# EAGLE board ELE-T201 (EAGLE 4.11)
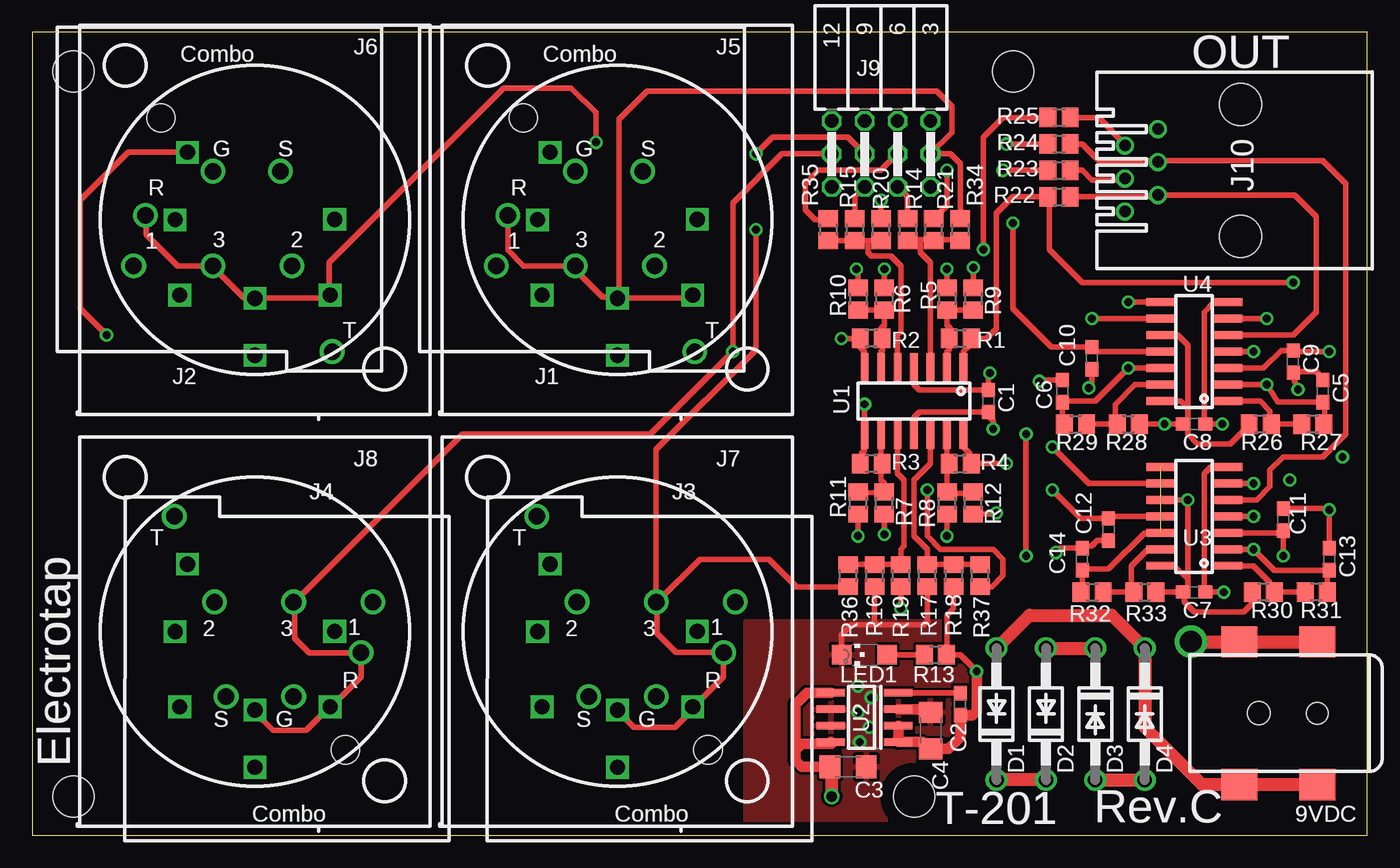
[diagram p0: board, top side]
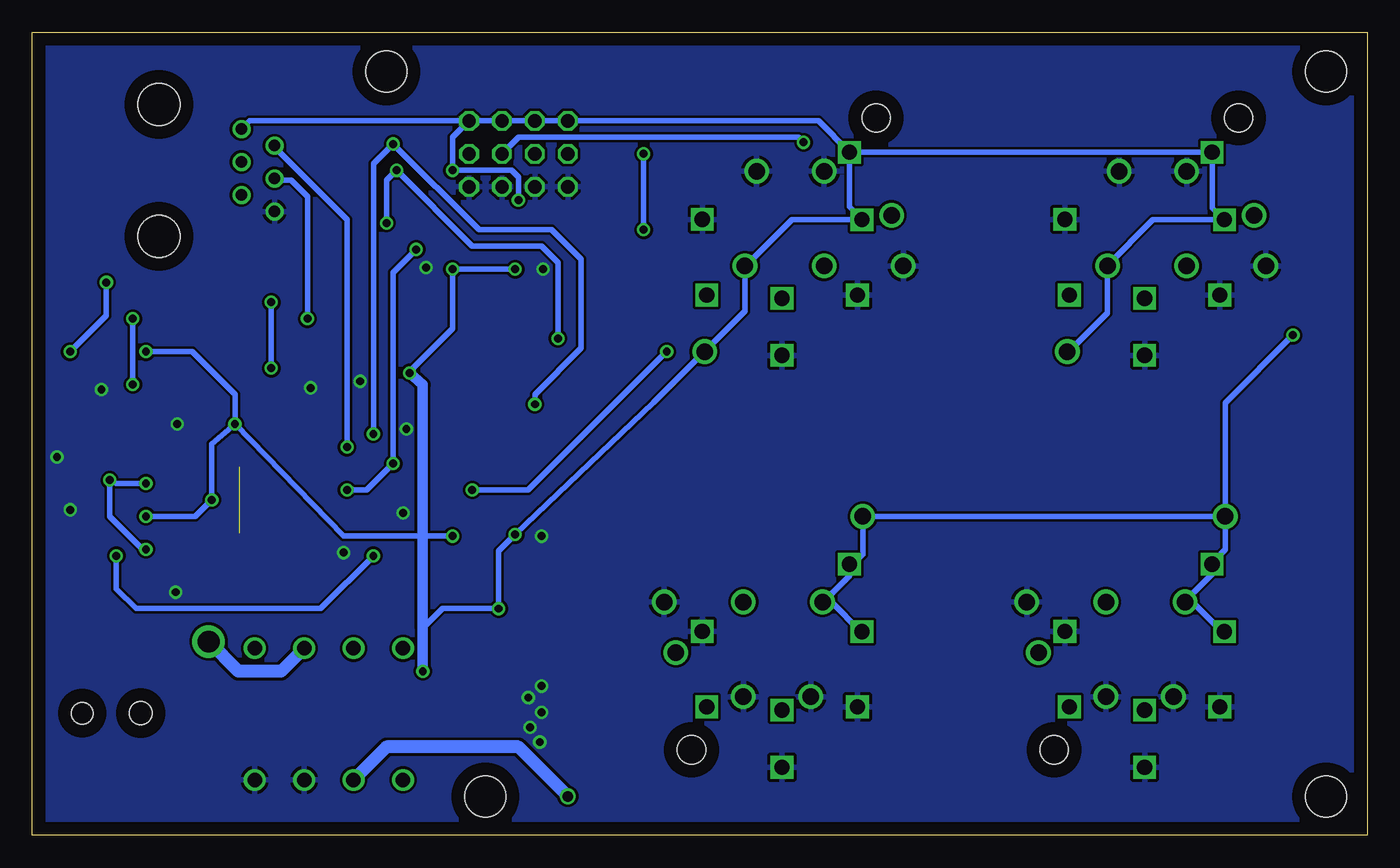
[diagram p1: board, bottom side, seen from below]

Size 102.85 x 61.9 mm. Coordinates in mm from the lower left corner, seen from the top.
Outline: 0,0 102.85,0 102.85,61.9 0,61.9 0,0
Copper layers (1*16): Top 0.035mm / dielectric 1.5mm / Bottom 0.035mm
Design rules "default": minimum track width 10mil, minimum drill 24mil, track to track 8mil, track to pad 8mil, pad to pad 8mil, via to via 8mil, smd to smd 8mil, copper to edge 40mil, drill to drill 8mil, minimum pad ring 10mil, minimum via ring 8mil, stop-mask expansion 4mil, vias tented up to drill 0mil, thermal gap 10mil
Holes 3.17 mm at 75.56,58.89 67.94,3.01 3.17,3.01 3.17,58.89

## Footprints (pad centres in the part's own frame; a part is rotated, then mirrored left to right if it is on the bottom)
POWER_CONNECTOR = smd 2.4 x 2.8: +1 10,-5; +2 10,-11; -1 -1,-5; -2 -1,-11 | hole 1.778: 4.5,-9.5 | hole 1.676: 4.5,-5
C0603 = smd 1.1 x 1: 1 -0.85,0; 2 0.85,0
C1206 = smd 1.6 x 1.8: 1 -1.4,0; 2 1.4,0
DO41-10 = drill 1.118 round: A 5.08,0; C -5.08,0
NEUTRIK_COMBO_CONNECTOR_H = drill 1.27 round: 1 5.9,6.6; 2 18.1,6.6; 3 12,6.6; G 12,13.9; R 6.8,10.5; S 17.2,13.9; T 21.2,0 | hole 2.184: 8,18
NEUTRIK_COMBO_CONNECTOR = drill 1.168 square: 1 6.15,0.025; 2 -6.15,0; 3 0,-6.05; G 0,-10.45; R 5.8,-5.8; S -5.8,-5.8; T -5.2,5.2
HEADER-FE-3X4-RA = drill 1.016 octagon: 1 -5.08,3.81; 2 -5.08,1.27; 3 -5.08,-1.27; 4 -2.54,3.81; 5 -2.54,1.27; 6 -2.54,-1.27; 7 0,3.81; 8 0,1.27; 9 0,-1.27; 10 2.54,3.81; 11 2.54,1.27; 12 2.54,-1.27
TELEPHONE_JACK = drill 0.889 round: 1 -3.175,8.89; 2 -1.905,6.35; 3 -0.635,8.89; 4 0.635,6.35; 5 1.905,8.89; 6 3.175,6.35 | hole 3.251: -5.08,0; 5.08,0
CHIPLED_1206 = smd 1.5 x 1.5: A 0,-1.75; C 0,1.75
R0805 = smd 1.3 x 1.5: 1 -0.85,0; 2 0.85,0
SO14 = smd 0.6 x 2.2: 1 -3.81,-2.6; 2 -2.54,-2.6; 3 -1.27,-2.6; 4 0,-2.6; 5 1.27,-2.6; 6 2.54,-2.6; 7 3.81,-2.6; 8 3.81,2.6; 9 2.54,2.6; 10 1.27,2.6; 11 0,2.6; 12 -1.27,2.6; 13 -2.54,2.6; 14 -3.81,2.6
SOIC8 = smd 0.6 x 2.2: 1 -1.905,-2.6; 2 -0.635,-2.6; 3 0.635,-2.6; 4 1.905,-2.6; 5 1.905,2.6; 6 0.635,2.6; 7 -0.635,2.6; 8 -1.905,2.6

## Placement (x,y rotation side)
9VDC  POWER_CONNECTOR  [POWER_CONNECTOR]  104.01,13.93 270 top
C1  0.1uF  [C0603]  73.66,33.49 270 top
C2  .01uF  [C0603]  71.5,10.12 90 top
C3  10uF  [C1206]  62.86,5.3 0 top
C4  10uF  [C1206]  69.21,8.09 90 top
C5  0.01uF  [C0603]  99.44,34.25 90 top
C6  0.01uF  [C0603]  79.37,34.25 90 top
C7  0.1uF  [C0603]  89.53,18.76 180 top
C8  0.1uF  [C0603]  89.53,31.71 180 top
C9  0.1uF  [C0603]  97.15,36.54 90 top
C10  0.1uF  [C0603]  81.66,36.79 90 top
C11  0.1uF  [C0603]  96.39,24.35 90 top
C12  0.1uF  [C0603]  82.93,23.58 270 top
C13  0.01uF  [C0603]  99.94,21.3 90 top
C14  0.01uF  [C0603]  80.89,21.3 90 top
D1  1N4001  [DO41-10]  74.29,9.36 90 top
D2  1N4001  [DO41-10]  78.1,9.36 90 top
D3  1N4001  [DO41-10]  81.91,9.36 270 top
D4  1N4001  [DO41-10]  85.72,9.36 270 top
J1  [NEUTRIK_COMBO_CONNECTOR_H]  29.84,37.3 0 top
J2  [NEUTRIK_COMBO_CONNECTOR_H]  1.9,37.3 0 top
J3  [NEUTRIK_COMBO_CONNECTOR_H]  60.07,24.6 180 top
J4  [NEUTRIK_COMBO_CONNECTOR_H]  32.13,24.6 180 top
J5  [NEUTRIK_COMBO_CONNECTOR]  45.08,47.46 0 top
J6  [NEUTRIK_COMBO_CONNECTOR]  17.14,47.46 0 top
J7  [NEUTRIK_COMBO_CONNECTOR]  45.08,15.71 0 top
J8  [NEUTRIK_COMBO_CONNECTOR]  17.14,15.71 0 top
J9  [HEADER-FE-3X4-RA]  64.13,53.81 180 top
J10  [TELEPHONE_JACK]  93.09,51.27 90 top
LED1  [CHIPLED_1206]  64.13,13.93 90 top
R1  0  [R0805]  71.5,38.32 0 top
R2  0  [R0805]  64.64,38.32 180 top
R3  0  [R0805]  64.64,28.66 180 top
R4  0  [R0805]  71.5,28.66 0 top
R5  np  [R0805]  70.48,41.36 270 top
R6  dont place  [R0805]  65.65,41.36 270 top
R7  dont place  [R0805]  65.65,25.62 90 top
R8  dont place  [R0805]  70.48,25.62 90 top
R9  np  [R0805]  72.51,41.36 270 top
R10  dont place  [R0805]  63.62,41.36 270 top
R11  dont place  [R0805]  63.62,25.62 90 top
R12  dont place  [R0805]  72.51,25.62 90 top
R13  1K  [R0805]  69.59,13.93 0 top
R14  1M/np  [R0805]  67.43,46.7 270 top
R15  1M  [R0805]  63.37,46.7 270 top
R16  1M  [R0805]  64.89,20.03 90 top
R17  1M  [R0805]  68.96,20.03 90 top
R18  1M  [R0805]  70.99,20.03 270 top
R19  1M  [R0805]  66.92,20.03 270 top
R20  1M  [R0805]  65.4,46.7 90 top
R21  1M/2.2K  [R0805]  69.46,46.7 90 top
R22  0  [R0805]  79.12,49.24 0 top
R23  0  [R0805]  79.12,51.27 0 top
R24  0  [R0805]  79.12,53.3 0 top
R25  0  [R0805]  79.12,55.33 0 top
R26  100K  [R0805]  94.61,31.71 180 top
R27  100K  [R0805]  98.67,31.71 180 top
R28  100K  [R0805]  84.45,31.71 0 top
R29  100K  [R0805]  80.39,31.71 0 top
R30  100K  [R0805]  94.86,18.76 180 top
R31  100K  [R0805]  98.93,18.76 180 top
R32  100K  [R0805]  81.66,18.76 0 top
R33  100K  [R0805]  85.72,18.76 0 top
R34  0/549  [R0805]  71.5,46.7 270 top
R35  0  [R0805]  61.34,46.7 270 top
R36  0  [R0805]  62.86,20.03 90 top
R37  0  [R0805]  73.02,20.03 90 top
U1  OPAMP-AD8608  [SO14]  67.94,33.49 180 top
U2  [SOIC8]  64.13,9.11 90 top
U3  TLC556D  [SO14]  89.53,24.6 90 top
U4  TLC556D  [SO14]  89.53,37.3 90 top

## Library data of the parts
9VDC C1-C14 D1-D4 J1-J10 U1-U4 = TEABOX-LIB
LED1 = led
R1-R37 = rcl

## Nets
+5V: C1.1 C2.1 C4.1 C7.2 C8.2 J1.2 J1.T J2.2 J2.T J3.2 J3.T J4.2 J4.T J5.2 J5.T J6.2 J6.T J7.2 J7.T J8.2 J8.T J9.3 J9.6 J9.9 J9.12 J10.6 R5.1 R6.1 R7.1 R8.1 R13.2 R18.2 R19.2 R20.2 R21.2 R26.2 R28.2 R30.2 R33.2 U1.4 U2.1 U2.2 U3.4 U3.10 U3.14 U4.4 U4.10 U4.14
GND: C1.2 C3.2 C4.2 C5.2 C6.2 C7.1 C8.1 C9.1 C10.1 C11.2 C12.2 C13.2 C14.2 D3.A D4.A J1.1 J1.G J1.S J2.1 J2.G J2.S J3.1 J3.G J3.S J4.1 J4.G J4.S J5.1 J5.G J5.S J6.1 J6.G J6.S J7.1 J7.G J7.S J8.1 J8.G J8.S J9.1 J9.4 J9.7 J9.10 J10.1 LED1.C R9.1 R10.1 R11.1 R12.1 R14.1 R15.1 R16.1 R17.1 U1.11 U2.3 U2.6 U2.7 U3.7 U4.7
N$1: J1.3 J1.R J5.3 J5.R J9.2 R34.1
N$2: J2.3 J2.R J6.3 J6.R J9.5 R35.1
N$3: J3.3 J3.R J7.3 J7.R J9.8 R36.1
N$4: J4.3 J4.R J8.3 J8.R J9.11 R37.1
N$5: J10.2 R22.2 U4.5
N$6: J10.3 R23.2 U4.9
N$7: J10.4 R24.2 U3.5
N$8: J10.5 R25.2 U3.9
N$9: R4.1 R8.2 R12.2 U1.13
N$10: R3.1 R7.2 R11.2 U1.9
N$11: R2.1 R6.2 R10.2 U1.6
N$12: R1.1 R5.2 R9.2 U1.2
N$13: LED1.A R13.1
N$14: C11.1 R3.2 R24.1 U1.8 U3.3
N$15: C12.1 R4.2 R25.1 U1.14 U3.11
N$16: C3.1 D1.C D2.C U2.5 U2.8
N$17: C10.2 R2.2 R23.1 U1.7 U4.11
N$18: 9VDC.-1 9VDC.-2 D2.A D3.C
N$19: 9VDC.+1 9VDC.+2 D1.A D4.C
N$20: C9.2 R1.2 R22.1 U1.1 U4.3
N$21: R26.1 R27.2 U4.1
N$22: C2.2 U2.4
N$23: C5.1 R27.1 U4.2 U4.6
N$24: R30.1 R31.2 U3.1
N$25: R28.1 R29.2 U4.13
N$26: R32.2 R33.1 U3.13
N$27: C13.1 R31.1 U3.2 U3.6
N$28: C6.1 R29.1 U4.8 U4.12
N$29: R14.2 R21.1 R34.2 U1.3
N$30: R16.2 R19.1 R36.2 U1.10
N$31: C14.1 R32.1 U3.8 U3.12
N$32: R17.2 R18.1 R37.2 U1.12
N$33: R15.2 R20.1 R35.2 U1.5

## Tracks (layer width: path | path; a pad name or v marks a point on that pad's centre or on a via)
+5V  (via drill 0.61)
  Top 0.406: J6.T 7.36,52.67 3.68,48.98 3.68,40.6 v5.71,38.57 | J6.T 12.06,52.54 11.81,52.54 11.81,52.67 11.93,52.79 11.94,52.79 J6.T | 70.48,13.93 71.5,13.93 v72.77,12.66 | R18.2 70.99,17.49 70.48,16.98 70.48,13.93 | 70.48,13.93 R13.2 | v66.92,17.49 R19.2 | U1.4 67.94,34.76 68.36,34.34 C1.1 73.66,35.39 73.78,35.52 v73.78,35.65 | v65.65,23.2 R7.1 | v70.48,23.08 R8.1 | v70.48,43.65 R5.1 | v65.65,43.65 R6.1 | U4.14 88.51,33.49 89.02,32.98 | 89.02,31.71 C8.2 v87.24,31.71 R28.2 | U3.14 88.01,20.79 89.02,19.77 89.02,19.01 | 86.74,25.87 U3.10 v89.02,25.87 89.02,19.01 | 88.77,18.76 89.02,18.76 89.02,19.01 | C7.2 88.93,19.01 89.02,19.01 | U4.10 88.26,38.57 89.02,37.81 89.02,32.98 | 89.02,31.71 89.02,32.98 | v94.1,37.3 U4.4 | U3.4 v94.1,24.6 94.36,24.35 | R26.2 93.76,31.62 92.32,30.19 89.78,30.19 89.02,30.95 89.02,31.71 | C7.2 R33.2 | C7.2 88.77,18.76 | 88.77,18.76 88.77,18 89.53,17.23 93.34,17.23 94.01,17.91 R30.2 | R21.2 70.48,48.56 v70.48,51.27 | v65.4,48.98 R20.2
  Top 0.813: U2.2 66.73,7.39 66.67,7.33 66.73,7.27 U2.1 68.57,7.2 69.21,6.57 C4.1 70.6,6.69 71.5,7.58 C2.1 | C2.1 71.5,9.36 | C2.1 72.42,9.27 72.77,9.61 v72.77,12.66
  Bottom 0.406: J9.3 J9.6 J9.9 J9.12 42.29,55.08 J5.T | J9.3 86.1,55.08 J10.6 | J5.T 39.88,48.48 38.93,47.53 J5.2 44.32,47.46 47.94,43.84 | J6.T | J6.T J5.T | 10.99,47.41 10.92,47.33 | 10.99,47.41 J6.2 16.5,47.46 20.06,43.9 J2.2 20,40.28 23.1,37.18 | J6.T 11.93,48.35 10.99,47.41 | 47.94,43.84 48,43.78 | 47.94,43.84 J1.2 47.94,40.41 J1.T | 23.1,37.18 23.11,37.17 | 23.1,37.18 J2.T | 10.93,24.85 J4.T 10.93,22.05 12.07,20.91 | 10.93,24.85 10.93,33.35 v5.71,38.57 | 12.07,20.91 12.19,20.79 | 12.07,20.91 J8.T 11.94,20.15 14.09,18 | 14.09,18 | 14.09,18 J4.2 13.46,18 11.17,15.71 J8.2 | 10.93,24.85 10.66,24.85 10.92,24.6 J3.T 38.87,21.67 39.87,20.66 39.88,20.67 J7.T 39.88,20.02 41.97,17.93 | 41.97,17.93 42.03,17.87 | 41.97,17.93 J3.2 41.27,18 38.98,15.71 J7.2 | J1.T | J1.T 54.99,33.36 v65.65,23.2 66.92,21.93 v66.92,17.49 71.24,17.49 72.77,15.96 | v70.48,23.08 72.77,23.08 78.86,23.08 v87.24,31.71 | v73.78,35.65 73.78,35.78 70.48,39.08 v70.48,43.65 v65.65,43.65 | J9.3 70.48,53.81 v70.48,51.27 65.91,51.27 65.4,50.76 v65.4,48.98 | v87.24,31.71 89.02,30.19 v89.02,25.87 90.29,24.6 v94.1,24.6 | v94.1,37.3 90.55,37.3 87.24,34 v87.24,31.71
  Bottom 0.813: v73.78,35.65 72.77,34.76 72.77,23.08 72.77,15.96 v72.77,12.66
GND  (via drill 0.61)
  Top 0.406: 64.89,16.22 R16.1 | 64.89,16.22 63.11,16.22 62.35,15.46 62.35,13.93 LED1.C | R17.1 68.96,16.47 68.7,16.22 64.89,16.22 | 74.04,31.2 v74.04,31.33 74.04,31.97 73.66,32.35 C1.2 68.36,32.64 67.94,32.22 U1.11 | v63.62,23.08 R11.1 | v74.29,24.85 74.54,24.85 74.46,24.77 R12.1 | v63.5,43.65 63.62,43.65 R10.1 | R9.1 v72.51,43.78 | v91.69,31.71 C8.1 90.29,31.71 90.29,40.35 91.05,41.11 U4.7 | v91.82,18.76 C7.1 90.29,18.76 90.29,27.9 90.8,28.41 U3.7 | C10.1 81.66,34.76 v81.4,34.51 | v97.53,34.38 97.15,35.27 97.15,35.78 | C9.1 97.15,35.78 | C6.2 77.43,35.1 v77.59,35.01 | C5.2 99.44,35.27 98.93,35.78 97.15,35.78 | C12.2 82.08,22.73 81.66,22.31 80.89,22.31 C14.2 79.2,22.15 v78.86,21.81 | C11.2 99.86,25.2 v99.94,25.11 C13.2 | 63.37,47.46 R15.1 63.37,49.24 J9.7 | J9.4 67.43,49.24 R14.1
  Top 0.813: C4.2 69.21,9.36 68.83,9.74 U2.3
  Top 1.016: D3.A D4.A
  other vias: 63.62,9.49 64.64,10.63 64.51,8.34 63.62,11.52 63.75,7.2 100.96,29.17
  pour Bottom: 0.63,61.43 0.63,0.47 102.23,0.47 102.23,61.43
  pour Top: 80.13,16.47 80.13,0.47 54.99,0.47 54.99,16.47
N$1
  Top 0.406: J1.R 36.64,45.1 37.84,43.9 41.91,43.9 41.9,43.9 | 41.9,43.9 J1.3 | 41.9,43.9 41.9,43.53 43.94,41.49 44.95,41.49 45.03,41.41 J5.3 45.21,41.41 | J5.R 50.92,41.62 50.71,41.41 45.21,41.41 | 45.21,41.41 45.21,41.36 | 45.21,41.41 45.21,55.21 47.37,57.37 69.72,57.37 70.86,56.22 70.86,54.19 J9.2 70.73,52.54 71.5,51.78 R34.1 71.5,47.46
N$2  (via drill 0.61)
  Top 0.406: v43.43,53.43 43.43,55.71 41.52,57.62 36.32,57.62 22.86,44.16 22.86,41.74 J6.R 22.9,41.66 22.65,41.41 J6.3 16.33,41.41 13.84,43.9 | 13.84,43.9 | 13.84,43.9 J2.3 11.18,43.9 8.76,46.32 8.76,47.71 8.7,47.77 J2.R | J9.5 65.4,51.27 60.57,51.27 59.56,50.25 59.56,48.22 60.32,47.46 61.34,47.46 R35.1
  Bottom 0.406: J9.5 65.4,53.81 43.81,53.81 v43.43,53.43
N$3  (via drill 0.61)
  Top 0.406: J7.3 45.08,9.61 46.35,8.34 49.53,8.34 50.88,9.7 J7.R 50.92,9.87 53.27,12.21 J3.R 49.61,14.1 48.13,15.58 48.13,18 | J9.8 62.86,53.81 57.02,53.81 v55.75,52.54 | 48.13,18 48.12,18 J3.3 48.07,29.74 55.75,37.43 v55.75,46.7 | 48.13,18 51.43,21.3 56.76,21.3 58.88,19.18 R36.1
  Bottom 0.406: v55.75,46.7 v55.75,52.54
N$4  (via drill 0.61)
  Top 0.406: J9.11 57.78,52.54 53.97,48.73 v53.97,37.3 47.62,30.95 33.14,30.95 20.19,18 | 20.19,18 20.18,18 J4.3 | 20.19,18 20.19,15.2 21.33,14.06 25.14,14.06 25.33,13.87 | 25.33,13.87 25.39,13.81 | 25.33,13.87 J4.R 25.33,12.21 22.98,9.87 J8.R 22.9,9.91 21.08,8.09 18.54,8.09 17.14,9.49 J8.3 | R37.1 73.95,19.18 74.8,20.03 74.8,21.3 74.04,22.06 69.97,22.06 68.96,23.08 v68.96,26.63
  Bottom 0.406: v53.97,37.3 64.64,26.63 v68.96,26.63
N$5
  Top 0.406: R22.2 86.48,49.24 86.74,49.49 J10.2 97.28,49.37 98.93,47.71 98.93,40.35 97.15,38.57 U4.5
N$6  (via drill 0.61)
  Top 0.406: R23.2 80.89,51.27 81.66,50.51 84.2,50.51 J10.3 | v81.66,39.84 U4.9
  Bottom 0.406: v81.66,39.84 81.66,49.24 82.93,50.51 84.2,50.51 J10.3 84.2,50.76
N$7
  Top 0.406: R24.2 80.89,53.3 82.16,52.03 86.74,52.03 | 86.74,52.03 J10.4 | 86.74,52.03 99.44,52.03 101.21,50.25 101.21,30.95 99.44,29.17 96.39,29.17 95.37,28.16 95.37,26.89 94.36,25.87 U3.5
N$8  (via drill 0.61)
  Top 0.406: J10.5 84.2,53.3 82.16,55.33 R25.2 | U3.9 81.4,27.14 v78.61,29.93
  Bottom 0.406: J10.5 84.2,53.05 78.61,47.46 v78.61,29.93
N$9
  Top 0.406: 70.48,28.41 70.65,28.58 R4.1 | 70.48,28.41 U1.13 | 70.48,28.41 R8.2 70.57,26.38 72.51,26.38 R12.2
N$10
  Top 0.406: R3.1 65.4,28.66 65.4,28.92 | 65.4,28.92 U1.9 | R11.2 63.71,26.38 63.11,26.38 R7.2 65.65,27.14 65.4,27.39 65.4,28.92
N$11
  Top 0.406: 65.4,36.03 U1.6 65.4,37.3 65.49,37.39 R2.1 65.4,38.32 65.4,39.08 65.65,39.33 R6.2 65.65,40.35 65.49,40.51 R10.2
N$12
  Top 0.406: 70.48,36.03 U1.2 70.48,37.3 70.65,37.47 R1.1 70.73,38.32 70.73,39.08 70.48,39.33 R5.2 72.42,40.51 72.51,40.6 R9.2
N$13
  Top 0.406: 68.96,13.93 R13.1 LED1.A
N$14  (via drill 0.61)
  Top 0.406: R3.2 63.88,28.66 63.88,29.43 64.13,29.68 U1.8 v64.13,33.24 | 78.35,53.3 R24.1 v75.05,53.3 | U3.3 91.82,23.33 | C11.1 96.05,23.33 U3.3 | U3.3 96.39,23.33 v96.39,21.55 | v76.58,30.95 v76.58,21.55
  Bottom 0.406: v64.13,33.24 64.13,34 60.57,37.55 60.57,44.41 62.86,46.7 68.45,46.7 v75.05,53.3 76.58,51.78 v76.58,30.95 | v96.39,21.55 96.39,19.01 94.86,17.49 80.64,17.49 v76.58,21.55
N$15  (via drill 0.61)
  Top 0.406: U1.14 71.75,29.93 72.26,29.43 72.26,28.66 | R4.2 72.26,28.66 | R25.1 74.8,55.33 73.27,53.81 v73.27,45.17 | 72.26,28.66 v75.05,28.66 | 87.24,24.6 U3.11 82.58,24.6 C12.1 80.81,24.43 v78.61,26.63
  Bottom 0.406: v73.27,45.17 75.05,43.4 v75.05,28.66 77.08,26.63 v78.61,26.63
N$16  (via drill 0.81)
  Top 0.813: C3.1 59.3,5.3 58.8,5.8 58.8,6.31 | 58.8,6.31 58.8,6.57 59.3,7.07 61.59,7.07 61.53,7.13 U2.8 | U2.5 59.69,11.01 58.8,10.12 58.8,6.31
  Top 1.016: D2.C D1.C | C3.1 61.59,5.3 v61.59,3.01
  Bottom 1.016: D2.C 75.56,6.82 65.4,6.82 v61.59,3.01
N$17  (via drill 0.61)
  Top 0.406: U1.7 64.13,37.3 63.79,37.64 R2.2 v62.35,38.32 | 78.35,51.27 R23.1 v74.8,51.27 | 86.99,37.3 U4.11 81.74,37.3 C10.2 78.52,37.64 75.56,40.6 v75.56,47.21
  Bottom 0.406: v62.35,38.32 62.35,44.16 63.62,45.43 68.96,45.43 v74.8,51.27 75.56,50.51 v75.56,47.21
N$18  (via drill 1.68)
  Top 1.016: D2.A D3.C | 9VDC.-2 92.59,14.93 92.58,14.95 | 9VDC.-2 9VDC.-1 | 9VDC.-2 89.29,14.93 v89.28,14.95
  Bottom 1.016: v89.28,14.95 86.99,12.66 83.69,12.66 D3.C
N$19
  Top 1.016: D1.A 76.83,16.98 83.18,16.98 D4.C 85.72,8.34 90.13,3.93 9VDC.+2 | 9VDC.+2 92.99,3.93 92.83,3.77 | 9VDC.+2 9VDC.+1
N$20  (via drill 0.61)
  Top 0.406: 71.75,35.78 U1.1 71.75,37.3 72.35,37.9 R1.2 73.53,38.32 74.29,39.08 74.29,47.97 75.56,49.24 R22.1 78.35,49.24 78.35,45.17 80.89,42.63 v97.15,42.63 | 91.82,36.03 U4.3 94.86,36.03 96.22,37.39 C9.2 97.15,37.3 v99.94,37.3
  Bottom 0.406: v97.15,42.63 97.15,40.09 v99.94,37.3
N$21
  Top 0.406: R27.2 R26.1 95.37,31.71 95.37,32.73 94.61,33.49 U4.1
N$22
  Top 0.406: C2.2 71.5,10.88 71.37,11.01 U2.4
N$23  (via drill 0.61)
  Top 0.406: 99.6,33.4 C5.1 95.97,33.4 v95.12,34.76 U4.2 92.07,34.76 | 99.6,33.4 99.69,33.49 | v95.12,39.84 U4.6 | R27.1 99.44,31.71 99.6,31.88 99.6,33.4
  Bottom 0.406: v95.12,34.76 v95.12,39.84
N$24
  Top 0.406: 91.82,20.79 U3.1 94.1,20.79 95.37,19.52 95.37,19.01 95.63,18.76 R30.1 R31.2 98.17,18.76
N$25
  Top 0.406: 83.69,31.71 R28.1 83.43,31.71 | R29.2 83.43,31.71 | U4.13 84.96,34.76 83.43,33.24 83.43,31.71
N$26
  Top 0.406: 84.96,18.76 R33.1 84.7,18.76 | R32.2 84.7,18.76 | U3.13 85.97,22.06 84.7,20.79 84.7,18.76
N$27  (via drill 0.61)
  Top 0.406: v94.1,27.14 U3.6 | U3.2 v94.1,22.06 95.71,20.45 C13.1 99.94,20.54 99.78,20.37 R31.1
  Bottom 0.406: v94.1,27.14 96.39,27.14 v96.9,27.39 96.9,24.6 94.36,22.06 v94.1,22.06
N$28  (via drill 0.61)
  Top 0.406: R29.1 79.37,31.71 C6.1 79.37,33.49 81.91,33.49 v84.45,36.03 U4.12 86.99,36.03 | v84.45,41.11 U4.8
  Bottom 0.406: v84.45,36.03 v84.45,41.11
N$29
  Top 0.406: U1.3 69.21,44.16 68.45,44.92 68.45,45.94 | 71.41,45.94 R34.2 71.5,45.94 69.46,45.94 R21.1 69.38,45.94 68.45,45.94 | R14.2 67.43,45.94 68.45,45.94
N$30
  Top 0.406: R16.2 67.09,20.88 66.92,21.04 R19.1 66.92,22.06 67.18,22.31 67.18,27.39 66.67,27.9 U1.10 | R16.2 64.89,21.3 | R16.2 R36.2 62.86,21.04
N$31  (1 unrouted)
  Top 0.406: U3.12 85.72,23.33 82.93,20.54 80.89,20.54 C14.1 80.89,18.76 R32.1
N$32
  Top 0.406: R17.2 69.21,20.88 | 69.21,20.88 70.9,20.88 70.99,21.04 R18.1 72.6,20.88 72.77,21.3 72.93,21.13 R37.2 | 69.21,20.88 69.21,21.04 | R17.2 68.96,20.79 | U1.12 69.21,28.66 67.94,27.39 67.94,23.08 68.96,22.06 R17.2
N$33
  Top 0.406: U1.5 66.67,38.57 66.92,38.82 66.92,43.9 66.16,44.67 64.64,44.67 64.38,44.92 64.38,45.85 | 64.38,45.85 63.46,45.85 63.37,45.94 R15.2 61.42,45.85 61.34,45.94 R35.2 | 64.38,45.85 R20.1

## Text on the board
tPlace: OUT | Electrotap | Rev.C | T-201
_tplace: 12 | 9 | 6 | 3 | OUT | J6 | J5 | Combo | Combo | J9 | R25 | J10 | G | S | G | S | R24 | R35 | R34 | R23 | R | R | R15 | R20 | R14 | R21 | R22 | 1 | 3 | 2 | 1 | 3 | 2 | R10 | U4 | R6 | R5 | R9 | T | T | R2 | R1 | C10 | C9 | J2 | J1 | U1 | C1 | C5 | C6 | C8 | R26 | R27 | R3 | R29 | R28 | J8 | J7 | R4 | J4 | J3 | C12 | R11 | T | T | R7 | R8 | R12 | U3 | C11 | C14 | C13 | R19 | R18 | C7 | R30 | R31 | 2 | 3 | 1 | 2 | 3 | 1 | R32 | R33 | R36 | R16 | R17 | R37 | LED1 | R13 | R | R | U2 | S | G | S | G | C2 | Electrotap | D1 | D2 | D3 | D4 | C4 | Combo | Combo | C3 | Rev.C | 9VDC | T-201